# EAGLE board Pyr0-Piezo_SingleDisk_Adapter_3pin (EAGLE 9.5.2)
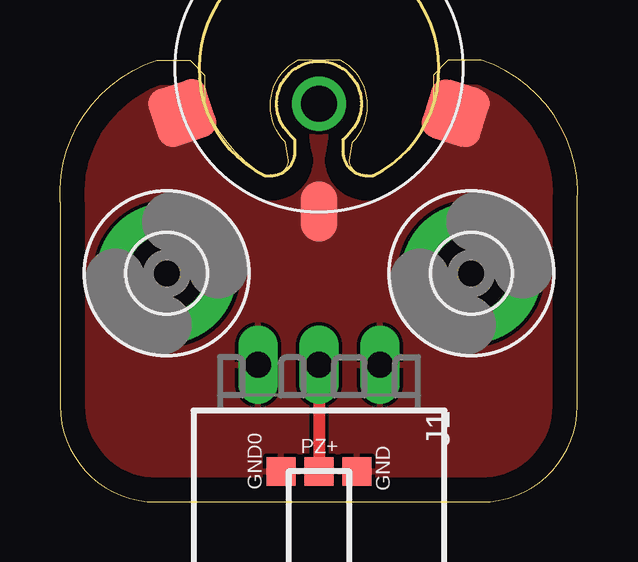
[diagram p0: board, top side]
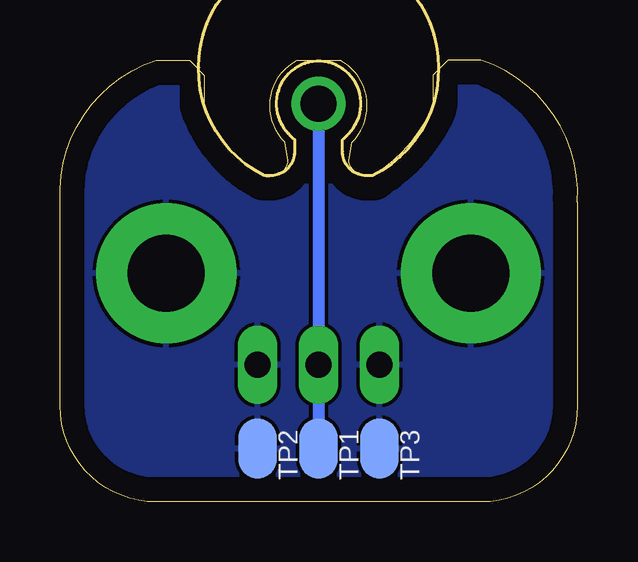
[diagram p1: board, bottom side, seen from below]

Size 21.59 x 18.42 mm. Coordinates in mm from the lower left corner, seen from the top.
Outline: 0.01,12.5 0.01,4 arc90 4.01,0 17.58,0 arc90 21.58,4 21.58,12.5 arc75 17.58,18.4 16.19,18.4 15.56,17.78 15.56,16.51 15.5,16.32 arc-40 13.09,13.59 12.83,13.59 arc-90 12.07,14.22 12.2,14.99 arc107 11.69,18.42 9.91,18.42 arc107 9.4,14.99 9.53,14.22 arc-90 8.77,13.59 8.52,13.59 arc-30 6.1,16.32 6.04,16.51 6.04,17.78 5.42,18.4 4.03,18.4 arc75 0.01,12.5
Copper layers (1*16): Top 0.035mm / dielectric 1.5mm / Bottom 0.035mm
Design rules "default *": minimum track width 6mil, minimum drill 0.35mm, track to track 6mil, track to pad 6mil, pad to pad 6mil, via to via 6mil, smd to smd 6mil, copper to edge 40mil, drill to drill 6mil, minimum pad ring 10mil, minimum via ring 8mil, stop-mask expansion 4mil, vias tented up to drill 0mil, thermal gap 6mil

## Footprints (pad centres in the part's own frame; a part is rotated, then mirrored left to right if it is on the bottom)
TP12SQ = smd 1.2 x 1.2: TP 0,0
HOLES_3,2-PAD = drill 3.2 pad 5.842: B3,2 0,0
70553-03 = drill 1.092 long: 1 -2.54,-7.62; 2 0,-7.62; 3 2.54,-7.62
PIEZO-DISK-12MM-OFFSET = smd 1.5 x 2.5: GND1 0,6 | smd 2.5 x 2.5 rotated 18.5: GND2 5.7,1.9 | smd 2.5 x 2.5 rotated 72.5: GND3 -5.7,1.9 | drill 1.5: PZ+ 0,1.5
TP16R_LONG = smd 2.5 x 1.6: TP 0,0

## Placement (x,y rotation side)
GND  TPTP12SQ  [TP12SQ]  12.39,1.27 90 top
GND0  TPTP12SQ  [TP12SQ]  9.21,1.27 90 top
H1  HOLES_MOUNT-PAD-ROUND3.2  [HOLES_3,2-PAD]  17.15,9.53 0 top
H2  HOLES_MOUNT-PAD-ROUND3.2  [HOLES_3,2-PAD]  4.45,9.53 0 top
J1  C-GRID-03-70553  [70553-03]  10.8,-1.9 180 top
PZ1  PIEZO-DISK12MM-OFFSET  [PIEZO-DISK-12MM-OFFSET]  10.8,18.1 180 top
PZ+  TPTP12SQ  [TP12SQ]  10.8,1.27 90 top
TP1  TPTP16R_LONG  [TP16R_LONG]  10.8,2.22 270 bottom
TP2  TPTP16R_LONG  [TP16R_LONG]  13.34,2.22 270 bottom
TP3  TPTP16R_LONG  [TP16R_LONG]  8.26,2.22 270 bottom

## Library data of the parts
GND GND0 H1 H2 PZ1 PZ+ TP1-TP3 = PiezoFFC
J1 = PiezoFFC; MF: MOLEX; OC_FARNELL: unknown; OC_NEWARK: unknown

## Nets
GND: GND0.TP GND.TP H1.B3,2 H2.B3,2 J1.1 J1.3 PZ1.GND1 PZ1.GND2 PZ1.GND3 TP2.TP TP3.TP
PZ+: J1.2 PZ1.PZ+ PZ+.TP TP1.TP

## Tracks (layer width: path | path; a pad name or v marks a point on that pad's centre or on a via)
GND
  pour Top: 0.01,17.45 0.01,0 21.58,0 21.58,17.45 13.04,17.45 12.07,18.42 9.53,18.42 8.57,17.45
  pour Bottom: 0.01,17.45 0.01,0 21.58,0 21.58,17.45 13.04,17.45 12.07,18.42 9.53,18.42 8.57,17.45
PZ+
  Top 0.508: J1.2 PZ+.TP
  Bottom 0.508: PZ1.PZ+ J1.2 TP1.TP